# EAGLE board naked_othermill_2 (EAGLE 7.4.0)
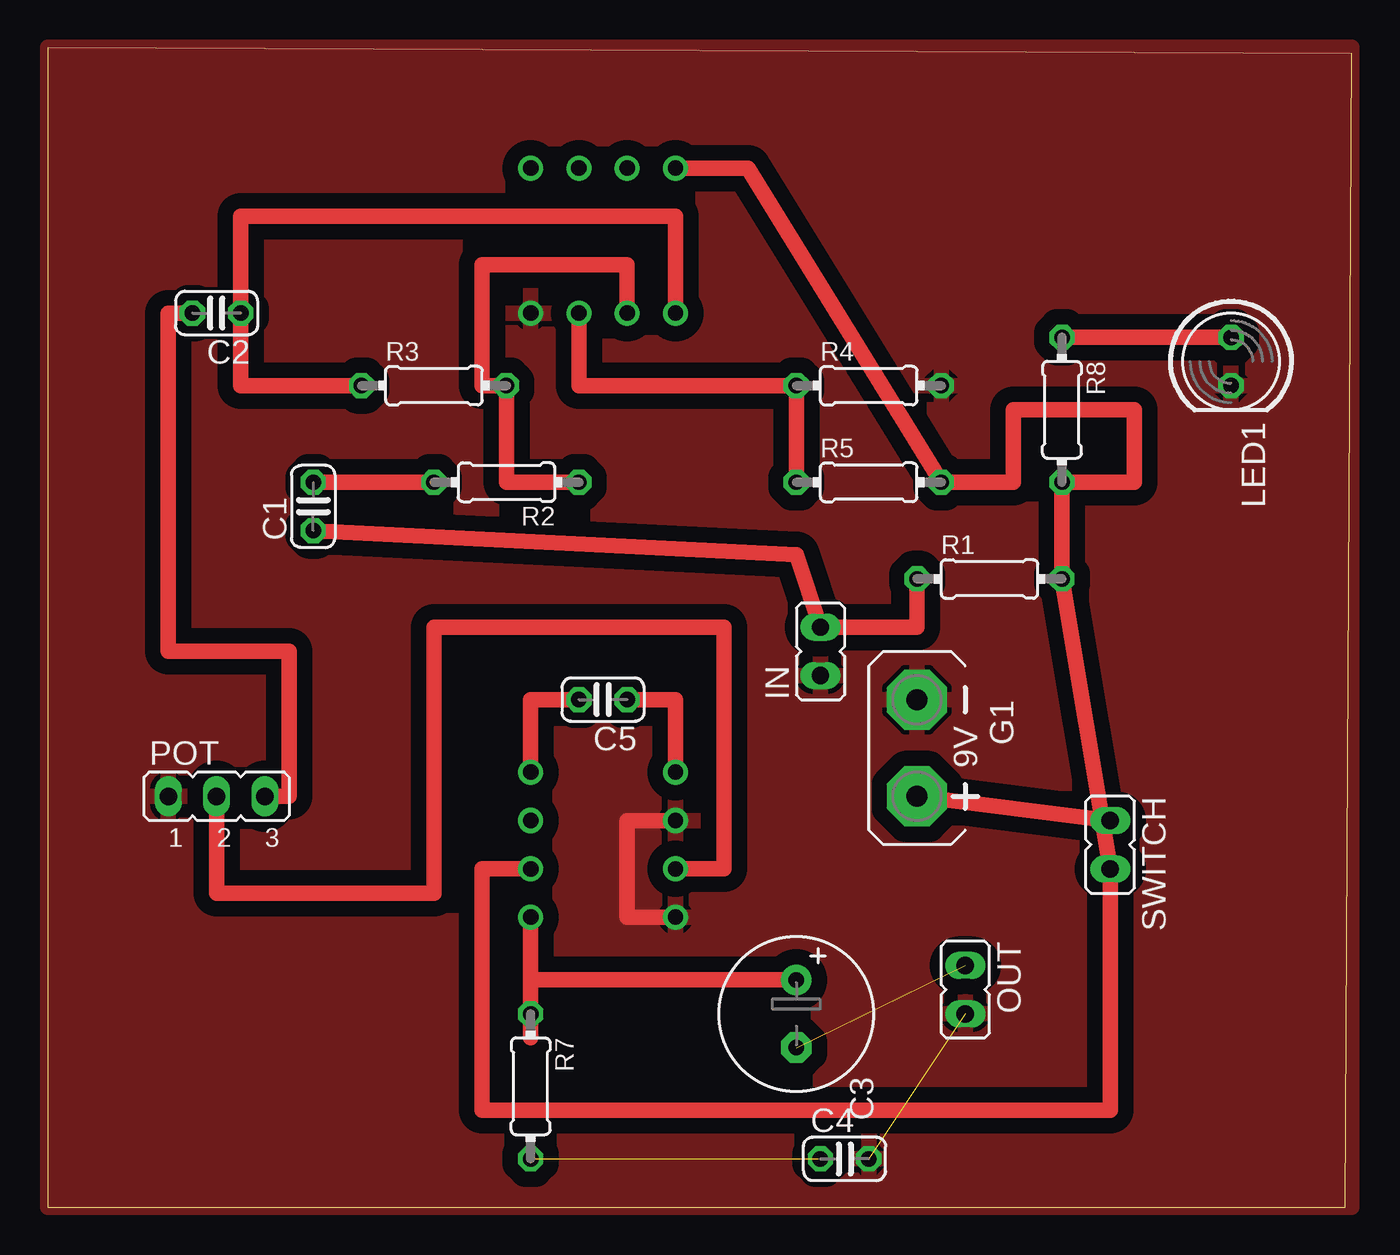
[diagram p0: board, top side]
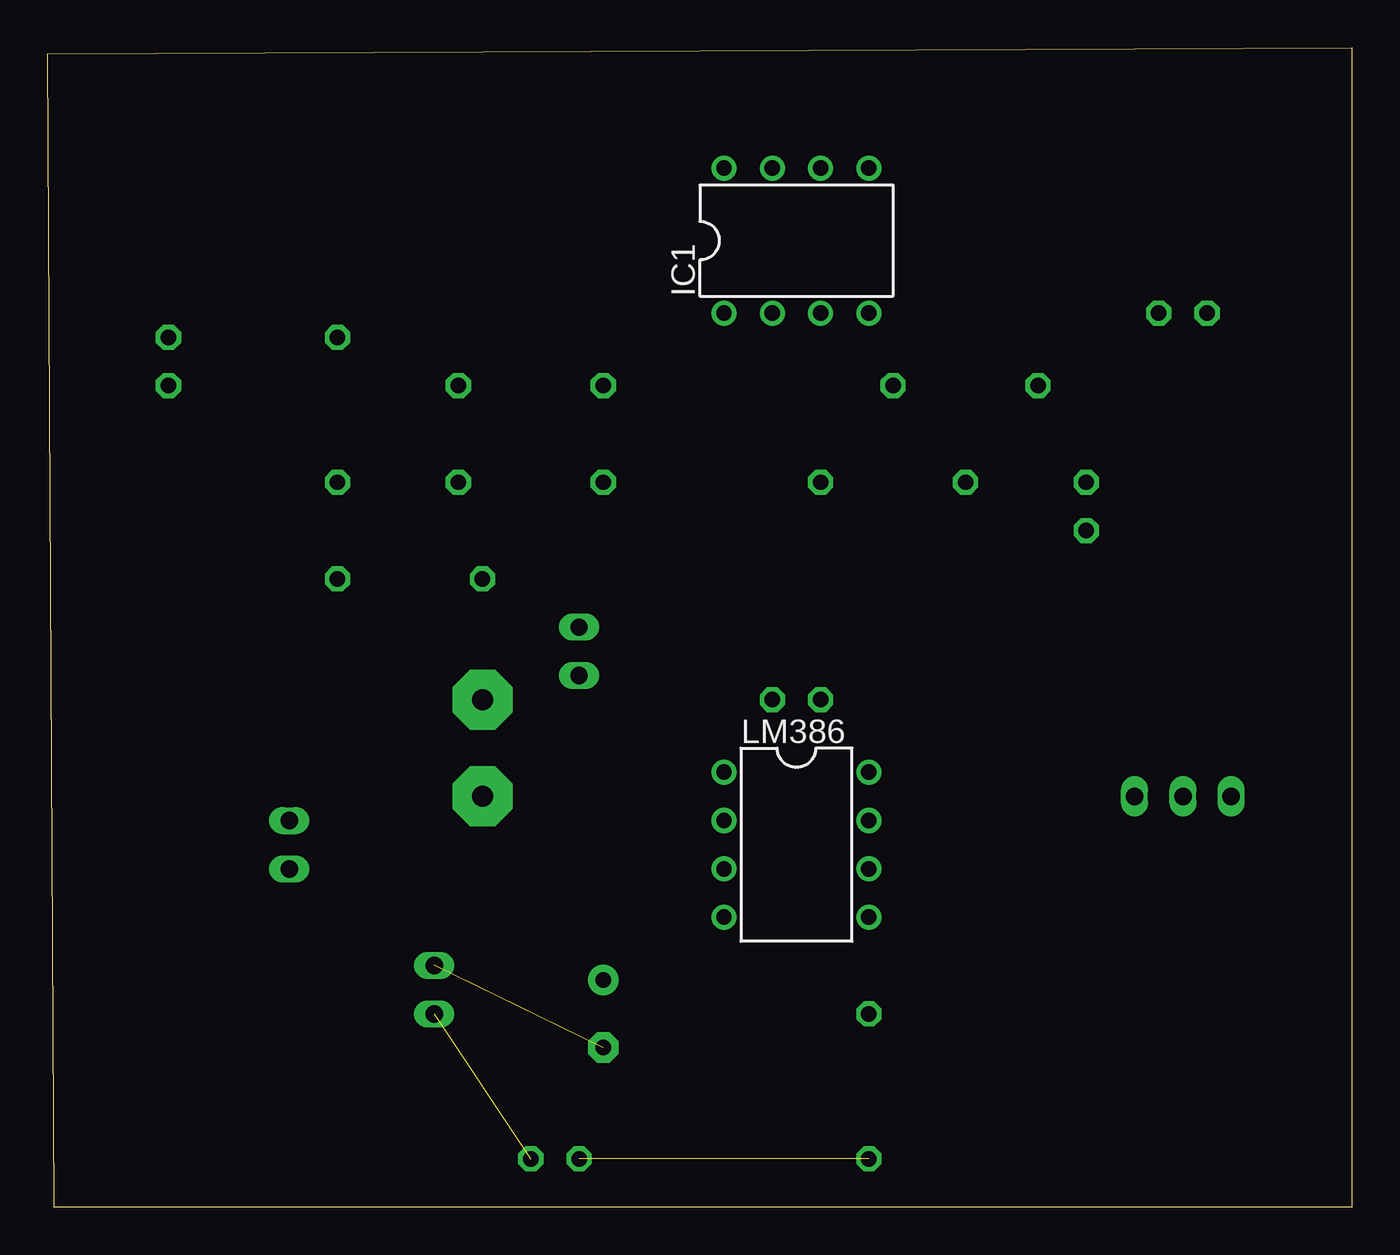
[diagram p1: board, bottom side, seen from below]

Size 68.59 x 60.95 mm. Coordinates in mm from the lower left corner, seen from the top.
Outline: 0,0 68.25,0 68.59,60.63 0,60.95 0,0
Copper layers (1*16): Top 0.035mm / dielectric 1.5mm / Bottom 0.035mm
Design rules "Othermill-DRC-1-32": minimum track width 8mil, minimum drill 0.8mm, track to track 0.794003125mm, track to pad 0.794003125mm, pad to pad 0.794003125mm, via to via 0.794003125mm, smd to smd 0mil, copper to edge 0mil, drill to drill 1mil, minimum pad ring 10mil, minimum via ring 10mil, stop-mask expansion 1mil, vias tented up to drill 30mil, thermal gap 10mil

## Footprints (pad centres in the part's own frame; a part is rotated, then mirrored left to right if it is on the bottom)
C025-024X044 = drill 0.813 octagon: 1 -1.27,0; 2 1.27,0
E3,5-8 = drill 0.813 pad 1.6: + -1.778,0 | drill 0.813 pad 1.6 octagon: - 1.778,0
AB9V = drill 1.118 pad 3.15 octagon: + 0,2.54; - 0,-2.54
DIL08 = drill 0.813 pad 1.27: 1 -3.81,-3.81; 2 -1.27,-3.81; 3 1.27,-3.81; 4 3.81,-3.81; 5 3.81,3.81; 6 1.27,3.81; 7 -1.27,3.81; 8 -3.81,3.81
JP1 = drill 0.914 long: 1 0,-1.27; 2 0,1.27
LED5MM = drill 0.813 octagon: A -1.27,0; K 1.27,0
JP2 = drill 0.914 long: 1 -2.54,0; 2 0,0; 3 2.54,0
0204/7 = drill 0.813 octagon: 1 -3.81,0; 2 3.81,0

## Placement (x,y rotation side)
C1  .1uF  [C025-024X044]  13.97,36.83 90 top
C2  .1uF  [C025-024X044]  8.89,46.99 180 top
C3  220uF  [E3,5-8]  39.37,10.16 270 top
C4  .1uF  [C025-024X044]  41.91,2.54 0 top
C5  10uF  [C025-024X044]  29.21,26.67 180 top
G1  AB9V  [AB9V]  45.72,24.13 180 top
IC1  LM358N  [DIL08]  29.21,50.8 0 bottom
IN  [JP1]  40.64,29.21 0 top
LED1  [LED5MM]  62.23,44.45 270 top
LM386  LM386N-1  [DIL08]  29.21,19.05 270 bottom
OUT  [JP1]  48.26,11.43 180 top
POT  10k  [JP2]  8.89,21.59 0 top
R1  22K  [0204/7]  49.53,33.02 0 top
R2  1K  [0204/7]  24.13,38.1 180 top
R3  10K  [0204/7]  20.32,43.18 0 top
R4  10K  [0204/7]  43.18,43.18 0 top
R5  10K  [0204/7]  43.18,38.1 0 top
R7  10  [0204/7]  25.4,6.35 270 top
R8  1k  [0204/7]  53.34,41.91 270 top
SWITCH  [JP1]  55.88,19.05 180 top

## Library data of the parts
C1 C2 C4 C5 R1-R5 R7 R8 = resistor
C3 = rcl
G1 = battery
IC1 LM386 = linear
IN OUT POT SWITCH = jumper
LED1 = led

## Nets
9V: IC1.8 LM386.6 R1.2 R5.2 R8.2 SWITCH.2
GND: C4.2 G1.- IC1.4 IN.1 LED1.K LM386.2 LM386.4 OUT.2 POT.1 R4.2
N$1: G1.+ SWITCH.1
N$2: C1.1 IN.2 R1.1
N$3: C1.2 R2.2
N$4: IC1.2 R2.1 R3.2
N$5: C5.1 LM386.1
N$6: IC1.3 R4.1 R5.1
N$7: C2.1 IC1.1 R3.1
N$8: C2.2 POT.3
N$9: LM386.3 POT.2
N$10: C3.+ LM386.5 R7.1
N$11: C3.- OUT.1
N$12: LED1.A R8.1
N$13: C4.1 R7.2
N$14: C5.2 LM386.8

## Tracks (layer width: path | path; a pad name or v marks a point on that pad's centre or on a via)
9V
  Top 0.813: IC1.8 36.83,54.61 R5.2 50.8,38.1 50.8,41.91 57.15,41.91 57.15,38.1 R8.2 R1.2 SWITCH.2 55.88,5.08 22.86,5.08 22.86,17.78 LM386.6
GND  (1 unrouted)
  Top 0.813: LM386.2 30.48,20.32 30.48,15.24 LM386.4
  pour Top (isolate 0.813): 0,0 0,60.96 68.58,60.96 68.58,0
N$1
  Top 0.813: SWITCH.1 G1.+
N$2
  Top 0.813: C1.1 39.37,34.29 IN.2 45.72,30.48 R1.1
N$3
  Top 0.813: C1.2 R2.2
N$4
  Top 0.813: R2.1 24.13,38.1 R3.2 22.86,43.18 22.86,49.53 30.48,49.53 IC1.2
N$5
  Top 0.813: C5.1 33.02,26.67 LM386.1
N$6
  Top 0.813: R5.1 R4.1 27.94,43.18 IC1.3
N$7
  Top 0.813: R3.1 10.16,43.18 C2.1 10.16,52.07 33.02,52.07 IC1.1
N$8
  Top 0.813: POT.3 12.7,21.59 12.7,29.21 6.35,29.21 6.35,46.99 C2.2
N$9
  Top 0.813: LM386.3 35.56,17.78 35.56,30.48 20.32,30.48 20.32,16.51 8.89,16.51 POT.2
N$10
  Top 0.813: LM386.5 R7.1 | 25.4,8.89 R7.1 | C3.+ 25.4,11.94 R7.1
N$11  (1 unrouted)
N$12
  Top 0.813: R8.1 LED1.A
N$13  (1 unrouted)
N$14
  Top 0.813: C5.2 25.4,26.67 LM386.8